# EAGLE board Desenho Circuito Simplificado (EAGLE 9.7.0)

Size 396.24 x 73.74 mm. Coordinates in mm from the lower left corner, seen from the top.
Outline: 0,0 396.24,0 396.24,73.74 0,73.74 0,0
Copper layers (1*16): Top 0.035mm / dielectric 1.5mm / Bottom 0.035mm
Design rules "default": minimum track width 6mil, minimum drill 0.35mm, track to track 6mil, track to pad 6mil, pad to pad 6mil, via to via 6mil, smd to smd 6mil, copper to edge 40mil, drill to drill 6mil, minimum pad ring 10mil, minimum via ring 8mil, stop-mask expansion 4mil, vias tented up to drill 0mil, thermal gap 10mil

## Footprints (pad centres in the part's own frame; a part is rotated, then mirrored left to right if it is on the bottom)
DIODE-AXIAL = drill 1: 1 -5.08,0; 2 5.08,0
MOTOR = drill 1.118 pad 3.15 octagon: + 2.54,0; - -2.54,0
SWITCH-MOMENTARY-PTH-6.5MM = drill 1.016 pad 1.88: 1 -3.251,2.261; 2 3.251,2.261; 3 -3.251,-2.261; 4 3.251,-2.261
SWITCH-SPDT-PTH-8.5X3.7MM = drill 1.016 pad 1.88: 1 -2.54,0; 2 0,0; 3 2.54,0
SEN-13322 = drill 1.016 long: 1 -2.54,0; 2 0,0; 3 2.54,0
ARDUINO-UNO-R3-SHIELD = drill 1.016 pad 1.88: 3.3V 24.13,-2.54; 5V 24.13,0; A0 24.13,12.7; A1 24.13,15.24; A2 24.13,17.78; A3 24.13,20.32; A4 24.13,22.86; A5 24.13,25.4; AREF -24.13,-13.97; D2 -24.13,20.32; D3 -24.13,17.78; D4 -24.13,15.24; D5 -24.13,12.7; D6 -24.13,10.16; D7 -24.13,7.62; D8 -24.13,3.81; D9 -24.13,1.27; D10 -24.13,-1.27; D11 -24.13,-3.81; D12 -24.13,-6.35; D13 -24.13,-8.89; GND@0 24.13,2.54; GND@1 24.13,5.08; GND@2 -24.13,-11.43; IOREF 24.13,-7.62; NC 24.13,-10.16; RES 24.13,-5.08; RX -24.13,25.4; SCL -24.13,-19.05; SDA -24.13,-16.51; TX -24.13,22.86; VIN 24.13,7.62
LCD-I2C = drill 1.016 long: 1 -19.05,-5.08; 2 -19.05,-7.62; 3 -19.05,-10.16; 4 -19.05,-12.7
TO92 = drill 0.813 octagon: 1 -1.27,0; 2 0,1.905; 3 1.27,0

## Placement (x,y rotation side)
D1  DIODEDIODE-AXIAL  [DIODE-AXIAL]  99.03,38.27 270 top
D2  DIODEDIODE-AXIAL  [DIODE-AXIAL]  102.24,38.38 270 top
D3  DIODEDIODE-AXIAL  [DIODE-AXIAL]  105.3,38.38 270 top
D4  DIODEDIODE-AXIAL  [DIODE-AXIAL]  108.52,38.38 270 top
M1  MOTOR_HDR  [MOTOR]  387.98,47.41 0 top
M2  MOTOR_HDR  [MOTOR]  102.66,47.36 0 top
S1  SWITCH_MOMENTARY  [SWITCH-MOMENTARY-PTH-6.5MM]  299.02,49.43 90 top
S2  SWITCH_MOMENTARY  [SWITCH-MOMENTARY-PTH-6.5MM]  311.29,49.15 90 top
S3  SWITCH_MOMENTARY  [SWITCH-MOMENTARY-PTH-6.5MM]  323.84,49.01 90 top
S4  SWITCH_MOMENTARY  [SWITCH-MOMENTARY-PTH-6.5MM]  337.21,49.01 90 top
S5  TOGGLE  [SWITCH-SPDT-PTH-8.5X3.7MM]  361.94,47.41 0 top
SENHIGROMETRO  SEN-13322  [SEN-13322]  157.54,61.42 0 top
U1  ARDUINO-UNO-R3-SHIELD  [ARDUINO-UNO-R3-SHIELD]  47.88,29.84 270 top
U2  LCD-16X2-I2CSUNFOUNDER-IIC  [LCD-I2C]  219.96,66.2 0 top
UDHT11  TMP36GT9Z_TO92  [TO92]  128.17,53.84 0 top

## Library data of the parts
D1-D4 M1 M2 S1-S5 SENHIGROMETRO U1 U2 UDHT11 = Tinkercad

## Nets
M1_-: M1.- S5.3
U1_5V: M1.+ M2.+ SENHIGROMETRO.1 U1.5V U2.2 UDHT11.3
U1_A0: SENHIGROMETRO.3 U1.A0
U1_A1: U1.A1 UDHT11.2
U1_D5: D4.2 U1.D5
U1_D6: D3.2 U1.D6
U1_D7: D2.2 U1.D7
U1_D8: D1.2 U1.D8
U1_D9: S4.4 U1.D9
U1_D10: S3.4 U1.D10
U1_D11: S2.4 U1.D11
U1_D12: S1.4 U1.D12
U1_GND: M2.- S1.1 S2.1 S3.1 S4.1 S5.2 SENHIGROMETRO.2 U1.GND@0 U1.GND@1 U1.GND@2 U2.1 UDHT11.1
U1_SCL: U1.SCL U2.4
U1_SDA: U1.SDA U2.3

## Tracks (layer width: path | path; a pad name or v marks a point on that pad's centre or on a via)
M1_-  (1 unrouted)
U1_5V  (5 unrouted)
U1_A0  (1 unrouted)
U1_A1  (1 unrouted)
U1_D5  (1 unrouted)
U1_D6  (1 unrouted)
U1_D7  (1 unrouted)
U1_D8  (1 unrouted)
U1_D9  (1 unrouted)
U1_D10  (1 unrouted)
U1_D11  (1 unrouted)
U1_D12  (1 unrouted)
U1_GND  (11 unrouted)
U1_SCL  (1 unrouted)
U1_SDA  (1 unrouted)